# Altium PCB timer.PcbDoc
Units mil, origin at the board's own origin, x right, y up, seen from the top; angles counter-clockwise.
Board outline 3110.24 x 1574.8 mil, 2 copper layers (Top Layer, Bottom Layer); 36 components, 45 nets, 137 pads, 17 vias.
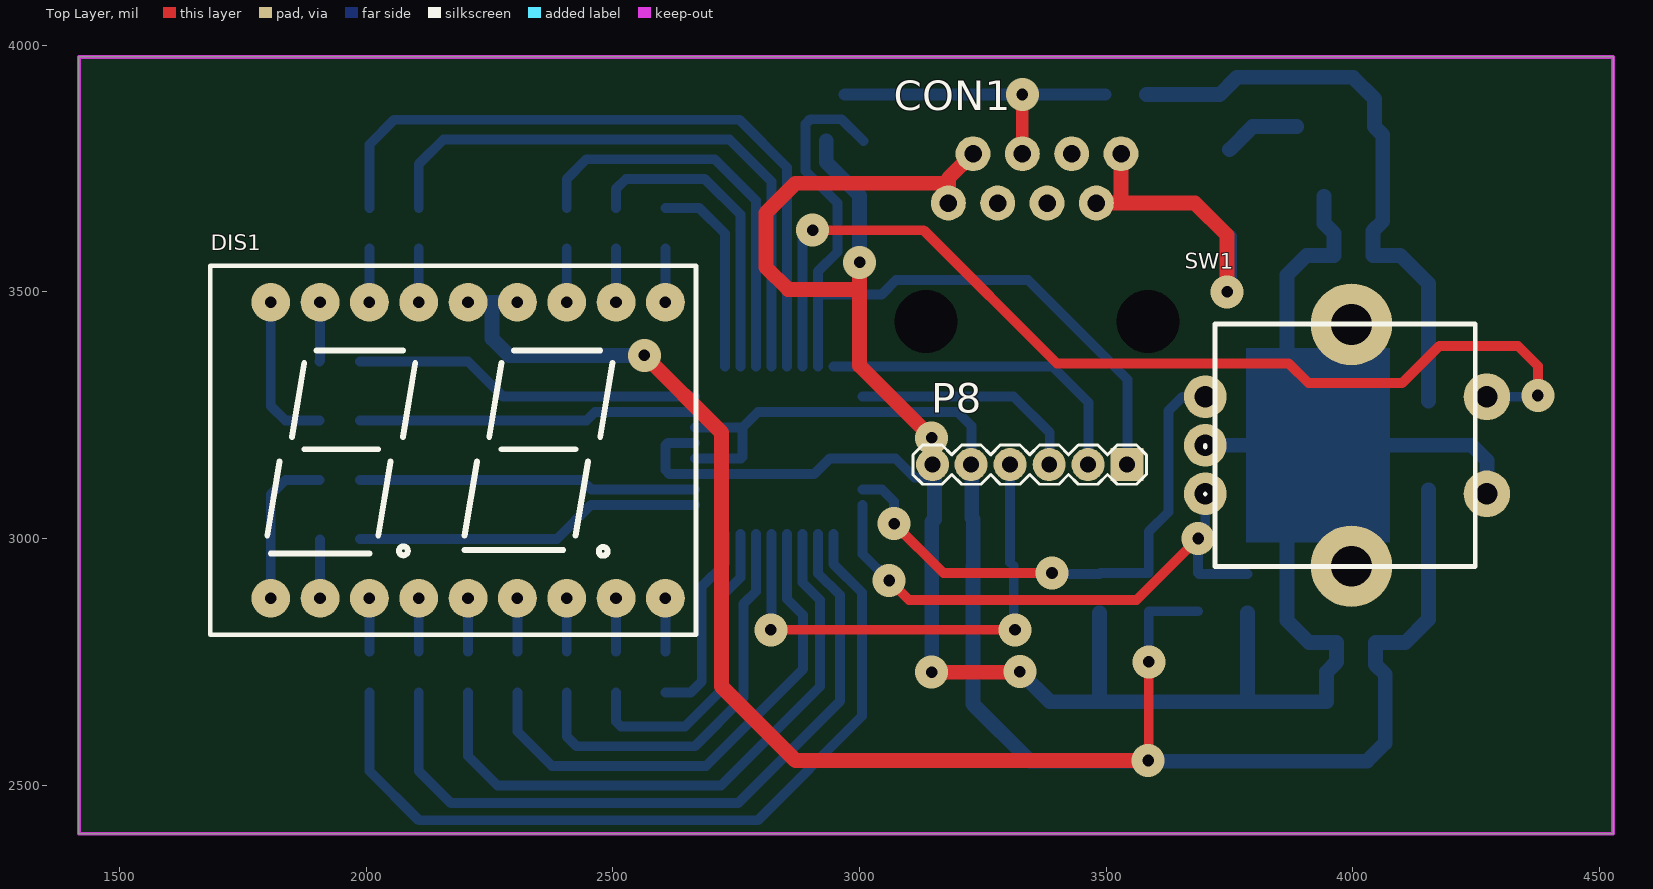
[diagram p0: Top Layer view]
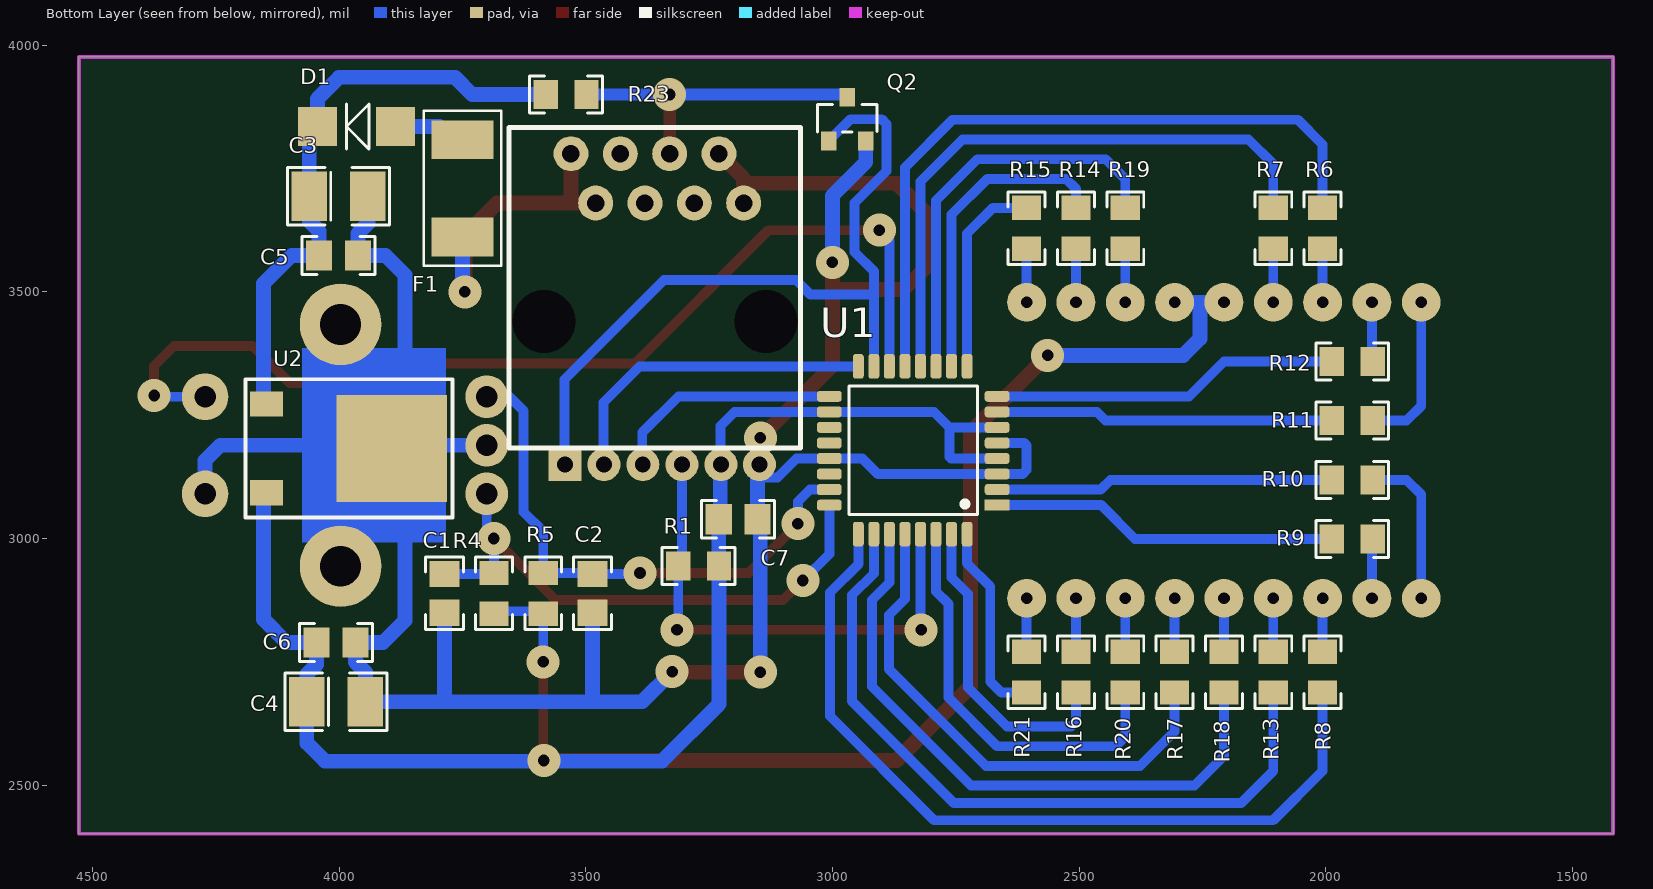
[diagram p1: Bottom Layer view, seen from below]
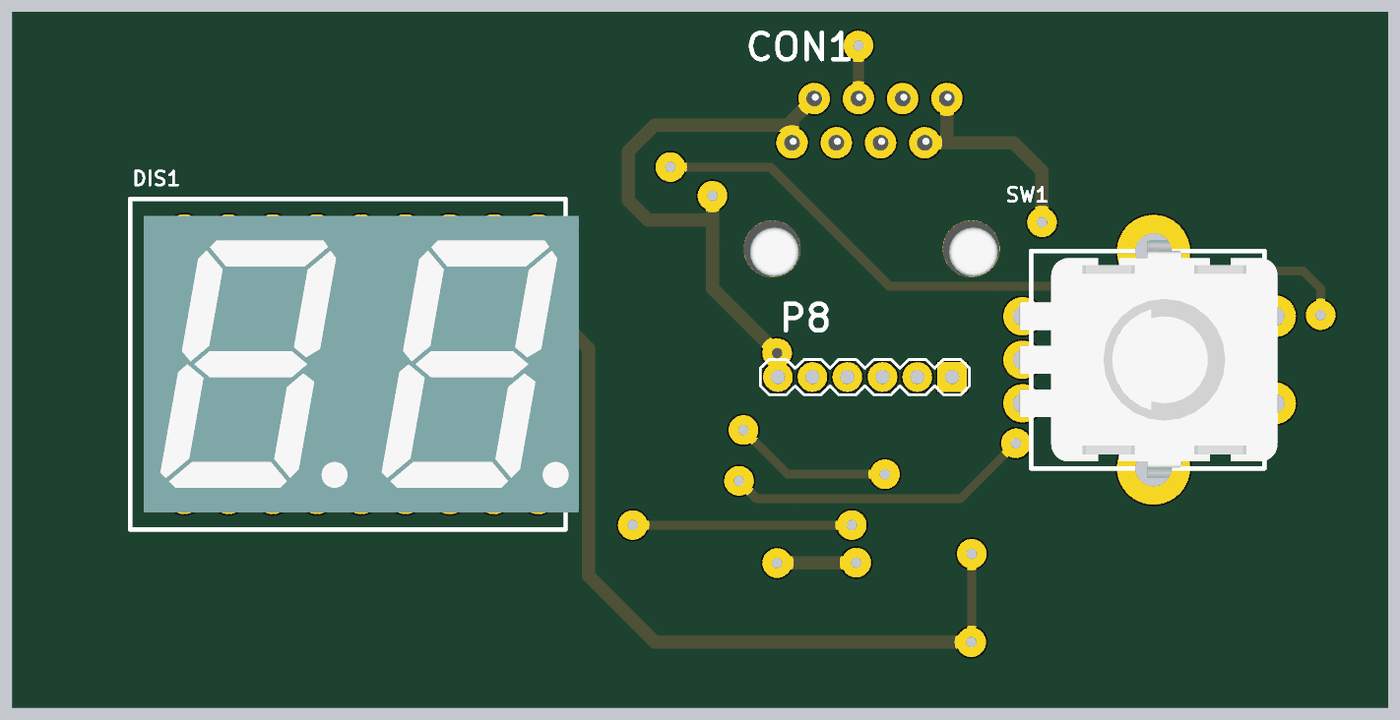
[diagram p2: 3D render of the assembled board from above, using the file's embedded part models]

## Layer stack, top to bottom
Top Layer: signal copper 1.4
Dielectric: dielectric 12.6, FR-4, Dk 4.8
Bottom Layer: signal copper 1.4

## Board outline
1417.32,2401.57 4527.56,2401.57 4527.56,3976.38 1417.32,3976.38

## Design rules (kind name [scope] priority, off if disabled: settings)
Clearance [All] p1: gap=5
ComponentClearance [All] p1 off: gap=10 collisioncheckmode=3 verticalgap=10 showdistances=FALSE
Height [All] p1 off: minheight=0 maxheight=1968.5 prefheight=500
PolygonConnect [All] p1: connectstyle=Relief reliefconductorwidth=10 reliefentries=4 polygonreliefangle="90 Angle" airgapwidth=10
RoutingVias [All] p1: holewidth=19.68 width=39.37 viastyle="Through Hole" minholewidth=19.68 minwidth=39.37 maxholewidth=19.68 maxwidth=39.37
SolderMaskExpansion [All] p1: expansion=4
Width [All] p1: maxlimit=50 minlimit=10 preferedwidth=20
26 further rules are at their usual default settings.

## Components (designator, comment, footprint, x,y, rotation, side; value= is the part's Value field where it differs from the comment)
C1 "100nF" C0805 3786.22,2888.98 r270 bottom
C2 "100nF" C0805 3486.22,2888.98 r270 bottom
C3 "4,7uF" TANC_B 4001.22,3693.98 r180 bottom
C4 "10uF" TANC_B 4006.22,2668.98 r180 bottom
C5 "100nF" C0805 4001.22,3573.98 r180 bottom
C6 "100nF" C0805 4006.22,2788.98 r180 bottom
C7 "100nF" C0805 3191.22,3038.98 r180 bottom
CON1 "MTJ-88FX1" MTJ-88FX1 3285,3570 r0 top
D1 "M4" SMA 3965,3835 r180 bottom
DIS1 "OPD-D5630LR-BW" OPD-D5631LR-BW 2156.22,3178.98 r0 top
F1 "0679-0500-01" 0679-0500-01 3750,3710 r90 bottom
P8 "Header 6 2mm" MA06-1_2mm 3345,3150 r180 top
Q2 "2N7002" SOT23 2970,3850 r180 bottom
R1 "10K" R0805 3271.22,2943.98 r0 bottom
R4 "10K" R0805 3686.22,2888.98 r270 bottom
R5 "10K" R0805 3586.22,2888.98 r270 bottom
R6 "180R" R0805 2006.22,3628.98 r90 bottom
R7 "180R" R0805 2106.22,3628.98 r90 bottom
R8 "180R" R0805 2006.22,2728.98 r270 bottom
R9 "180R" R0805 1946.22,2998.98 r0 bottom
R10 "180R" R0805 1946.22,3118.98 r0 bottom
R11 "180R" R0805 1946.22,3238.98 r0 bottom
R12 "180R" R0805 1946.22,3358.98 r0 bottom
R13 "180R" R0805 2106.22,2728.98 r270 bottom
R14 "180R" R0805 2506.22,3628.98 r90 bottom
R15 "180R" R0805 2606.22,3628.98 r90 bottom
R16 "180R" R0805 2506.22,2728.98 r270 bottom
R17 "180R" R0805 2306.22,2728.98 r270 bottom
R18 "180R" R0805 2206.22,2728.98 r270 bottom
R19 "180R" R0805 2406.22,3628.98 r90 bottom
R20 "180R" R0805 2406.22,2728.98 r270 bottom
R21 "180R" R0805 2606.22,2728.98 r270 bottom
R23 "10K" R0805 3540,3900 r0 bottom
SW1 "ENCODER" EC12E20-24P24C-SW 3986.22,3188.98 r270 top
U1 "ATmega8-AU/MU" TQFP-32A 2836.22,3178.98 r0 bottom
U2 "MC7805CDTG" TO-252 4020,3182.8 r270 bottom

## Footprints (in the part's own frame and the unit in brackets; to place one, negate y for a bottom-side part, rotate by r counter-clockwise, add the part's x,y. Pads: shape width x height; smd on the part's side, far side on the other; paste and mask are expansions set on the pad)
0679-0500-01 [mm]
  rect 2x3.18 smd: 1(-2.5,0) 2(2.5,0)
  silkscreen extent -4,-2 4,2, body extent -3.05,-1.3 3.05,1.39, height 2.69
C0805 [mm] "Chip Capacitor, Body 2.0x1.2mm, Height 1.3mm, IPC Low Density"
  rect 1.35x1.55 smd: 1(-1,0) 2(1,0)
  silkscreen extent -1.88,-0.97 1.88,0.97, body extent -1.1,-0.72 1.1,0.72, height 1.3
EC12E20-24P24C-SW [mm]
  round 2.2 hole 1.1: A(-2.5,-7.25) B(2.5,-7.25) C(0,-7.25)
  round 4.2 hole 2.1: M(-6.225,0.275) M(6.225,0.275)
  round 2.4 hole 1.1: S1(-2.5,7.25) S2(2.5,7.25)
  silkscreen extent -6.25,-7.25 6.25,6.65, body extent -6.85,-7.43 6.81,7.4, height 21
MA06-1_2mm [mm]
  rect 1.7x1.7 hole 0.813: 1(-5,0)
  round 1.7 hole 0.813: 2(-3,0) 3(-1,0) 4(1.016,0) 5(3.023,0) 6(5.004,0)
  silkscreen extent -6,-1 6.02,1.02
MTJ-88FX1 [mm]
  round 1.8 hole 0.9: 1(6.223,5.334) 2(4.953,2.794) 3(3.683,5.334) 4(2.413,2.794) 5(1.143,5.334) 6(-0.127,2.794) 7(-1.397,5.334) 8(-2.667,2.794)
  round 0 hole 3.25: M(-3.81,-3.302) M(7.62,-3.302)
  Top Layer lines w0.25: -3.81,-3.302 -3.595,-3.302
  body extent -5.61,-9.83 9.67,6.73, height 16.55
OPD-D5631LR-BW [mm]
  round 2 hole 0.6: 1(-8.89,-7.62) 2(-6.35,-7.62) 3(-3.81,-7.62) 4(-1.27,-7.62) 5(1.27,-7.62) 6(3.81,-7.62) 7(6.35,-7.62) 8(8.89,-7.62) 9(11.43,-7.62) 10(11.43,7.62) 11(8.89,7.62) 12(6.35,7.62) 13(3.81,7.62) 14(1.27,7.62) 15(-1.27,7.62) 16(-3.81,7.62) 17(-6.35,7.62) 18(-8.89,7.62)
  Top Layer lines w0.25: -9.525,-7.95 -9.474,-7.95
  silkscreen extent -12,-9.5 13,9.5, body extent -11.23,-8.51 13.77,8.51, height 8
R0805 [mm] "Chip Resistor, Body 2.0x1.3mm, IPC Low Density"
  rect 1.25x1.5 smd: 1(-1.05,0) 2(1.05,0)
  silkscreen extent -1.88,-0.95 1.88,0.95, body extent -1.1,-0.67 1.1,0.67, height 0.7
SMA [mil]
  rect 79x79 smd: 1(-78.87,0) 2(78.87,0)
  silkscreen extent -20,-46 26,46, body extent -98,-53 98,53, height 87
SOT23 [mil]
  rect 32x38 smd: 1(-37.6,-44.33) 2(37.6,-44.33) 3(0,44.33)
  silkscreen extent -60,-26 60,30, body extent -57,-49 57,48, height 40
TANC_B [mil]
  rect 72x100 smd: 1(-59.53,0) 2(59.53,0)
  silkscreen extent -103,-58 103,58, body extent -69,-55 70,55, height 75
TO-252 [mm]
  rect 1.3x1.7 smd: 1(-2.285,-3.22) 3(2.285,-3.22)
  rect 5.5x5.7 smd: 2(0,3.22)
  silkscreen extent -3.56,-4.32 3.56,6.35, body extent -3.29,-3.95 3.29,5.75, height 2.3
TQFP-32A [mil]
  rect 50x22 smd: 1(-170,111.22)
  rrect50% 50x22 smd: 2(-170,79.72) 3(-170,48.23) 4(-170,16.73) 5(-170,-14.76) 6(-170,-46.26) 7(-170,-77.76) 8(-170,-109.25) 17(170,-109.25) 18(170,-77.76) 19(170,-46.26) 20(170,-14.76) 21(170,16.73) 22(170,48.23) 23(170,79.72) 24(170,111.22)
  rrect50% 22x50 smd: 9(-109.25,-170) 10(-77.76,-170) 11(-46.26,-170) 12(-14.76,-170) 13(16.73,-170) 14(48.23,-170) 15(79.72,-170) 16(111.22,-170) 25(111.22,170) 26(79.72,170) 27(48.23,170) 28(16.73,170) 29(-14.76,170) 30(-46.26,170) 31(-77.76,170) 32(-109.25,170)
  silkscreen extent -130,-130 130,130, body extent -180,-180 182,182, height 47

## Part data
C1 C2 C5 C6 C7: library part Cap, "Capacitor"
C3 C4: library part Cap_Pol, "Capacitor Polarized"
D1: library part Diode
DIS1: library part 2x8SEGMENTS
F1: "Bezpiecznik: topikowy; szybki; ceramiczny; 500mA; 125VAC; 125VDC"
P8: library part "Header 6", "Header, 6-Pin"
Q2: library part 2N7002(GSD), "N-MOSFET"
R1 R4 R5 R6 R7 R8 R9 R10 R11 R12 R13 R14 R15 R16 R17 R18 R19 R20 R21 R23: library part Res, "Resistor"
SW1: "EC12E20-24P24C-SW"
U1: "TQFP - 32pin / MLF - 32pin"
U2: library part 78xx

## Via types
v1: diameter 66.93, hole 23.62, Top Layer to Bottom Layer, 17 vias

## Nets (pads, with @x,y where several pads share a name; then routed paths per layer and width w, separated by ;. In a path a pad name is that pad's centre, name@x,y a point inside that pad or via, vN(x,y) a via of type N, cw(c..) or ccw(c..) an arc to the next point about the centre after c; other vN are vias at no path point)
5V: C4.1 C6.1 C7.1 DIS1.13 DIS1.14 P8.5 R1.1 R4.2 R5.2 U1.4 U1.6 U1.18 U2.3 | length 5362
  Top Layer w20: v1@3586.22,2548.78 v1(3586.22,2750)
  Top Layer w30: DIS1.13 DIS1.13@2316.02,3478.98 ; v1(2563.78,3371.22) 2720,3215 2720,2700 2870,2550 v1(3585,2550)
  Bottom Layer w20: U1.4 2759.49,3162.24 2762.48,3165.24 2762.48,3225.24 ; U1.6 2762.48,3225.24 ; P8.5@3227.22,3148.98 3227.22,3227.78 3198.27,3256.73 U1.18 2793.98,3256.73 2762.48,3225.24 ; R1.1 R1.1@3230.59,2944.69 ; v1@3586.22,2761.22 R5.2 ; R5.2@3586.22,2852.64 R4.2@3686.22,2852.64
  Bottom Layer w30: DIS1.14 2255,3478.98 ; DIS1.13 2255,3478.98 ; v1(2563.78,3371.22) 2288.78,3371.22 2255,3405 2255,3478.98 ; C7.1@3227.22,3042.35 P8.5@3227.22,3148.98 ; R1.1 3229.88,2664.37 3345.75,2548.5 4028.5,2548.5 4065.75,2585.75 C4.1 4065.75,2724.45 4045.59,2744.61 C6.1 4106.22,2788.98 4152.99,2835.75 U2.3@4152.99,3099.02 ; R1.1@3230.59,2944.69 C7.1
12V: C3.1 C5.1 D1.1 R23.2 U2.1 | length 1201.9
  Bottom Layer w30: R23.2 3730,3900 3765,3935 4000,3935 4043.87,3891.13 D1.1 4060.75,3818.12 C3.1 4060.75,3643.5 4040.59,3623.35 C5.1 4096.22,3573.98 4152.99,3517.2 U2.1@4152.99,3278.94
A1: R6.2 U1.13 | length 1439.4
  Bottom Layer w20: R6.2 2006.22,3798.98 2056.22,3848.98 2756.22,3848.98 2852.95,3752.24 U1.13
A2: R14.2 U1.10 | length 636.9
  Bottom Layer w20: R14.2 2506.22,3708.98 2526.22,3728.98 2686.22,3728.98 2758.46,3656.73 U1.10
B1: R7.2 U1.12 | length 1234.7
  Bottom Layer w20: R7.2 2106.22,3758.98 2156.22,3808.98 2736.22,3808.98 2821.46,3723.74 U1.12
B2: R15.2 U1.9 | length 411.6
  Bottom Layer w20: R15.2 2674.88,3670.32 2726.97,3618.23 U1.9
C1: R8.2 U1.25 | length 1679.1
  Bottom Layer w20: R8.2 2006.22,2528.98 2106.22,2428.98 2793.98,2428.98 3005,2640 3005,2890.2 2947.44,2947.76 U1.25
C2: R16.2 U1.31 | length 639.3
  Bottom Layer w20: R16.2 2506.22,2628.98 2516.22,2618.98 2646.22,2618.98 2725,2697.76 2725,2887.76 2758.46,2921.22 U1.31
D1: R9.2 U1.1 | length 707.2
  Bottom Layer w20: R9.2 2386.22,2998.98 2455,3067.76 U1.1
D2: R17.2 U1.28 | length 1054.9
  Bottom Layer w20: R17.2 2306.22,2608.98 2376.22,2538.98 2688.98,2538.98 2885,2735 2885,2845.2 2852.95,2877.24 U1.28
DP1: R13.2 U1.26 | length 1481.9
  Bottom Layer w20: R13.2 2106.22,2528.98 2171.22,2463.98 2753.98,2463.98 2960,2670 2960,2885.2 2915.94,2929.25 U1.26
DP2: R21.2 U1.32 | length 401.5
  Bottom Layer w20: R21.2 2657.64,2687.64 2680,2710 2680,2902.76 2726.97,2949.72 U1.32
E1: R10.2 U1.2 | length 686.8
  Bottom Layer w20: R10.2 2436.22,3118.98 2455.94,3099.25 U1.2
E2: R18.2 U1.27 | length 1274.3
  Bottom Layer w20: R18.2 2206.22,2558.98 2266.22,2498.98 2718.98,2498.98 2920,2700 2920,2875.2 2884.45,2910.75 U1.27
EN_A: C2.1 R5.1 SW1.A U1.23 | length 1104.5
  Top Layer w20: v1(3070,3030) 3170,2930 v1(3390,2930)
  Bottom Layer w20: U1.23 3045.75,3099.25 3070,3075 v1(3070,3030) ; v1(3390,2930) 3391.65,2928.35 C2.1 3488.19,2930.32 R5.1 ; R5.1@3586.22,2935.32 3586.22,3013.98 3626.22,3053.98 3626.22,3258.98 3654.65,3287.4 SW1.A
EN_B: C1.1 R4.1 SW1.B U1.24 | length 1136.7
  Top Layer w20: v1(3060,2915) 3100,2875 3561.22,2875 v1(3686.22,3000)
  Bottom Layer w20: U1.24 3006.22,2968.78 v1(3060,2915) ; SW1.B 3700.79,3023.54 3686.22,3008.98 v1(3686.22,3000) R4.1 3688.19,2928.35 C1.1
EN_SW: SW1.S1 U1.14 | length 2095
  Top Layer w20: v1(2905,3625) 3130,3625 3400,3355 3870,3355 3910,3315 4100,3315 4175,3390 4335,3390 4375,3350 v1(4375,3290)
  Bottom Layer w20: U1.14 2884.45,3604.45 v1(2905,3625) ; SW1.S1 4372.4,3287.4 v1(4375,3290)
F1: R11.2 U1.7 | length 686
  Bottom Layer w20: R11.2 2446.22,3238.98 2463.98,3256.73 U1.7
F2: R19.2 U1.11 | length 829.9
  Bottom Layer w20: R19.2 2406.22,3728.98 2446.22,3768.98 2706.22,3768.98 2789.96,3685.24 U1.11
G1: R12.2 U1.8 | length 708
  Bottom Layer w20: R12.2 2206.02,3358.98 2276.77,3288.23 U1.8
G2: R20.2 U1.30 | length 838.2
  Bottom Layer w20: R20.2 2406.22,2598.98 2426.22,2578.98 2666.22,2578.98 2765,2677.76 2765,2867.76 2789.96,2892.72 U1.30
GND: C1.2 C2.2 C3.2 C4.2 C5.2 C6.2 C7.2 CON1.7 CON1.8 P8.6 Q2.2 SW1.C SW1.M SW1.S2 U1.3 U1.5 U1.21 U2.2 | length 5605
  Top Layer w30: v1(3000,3560) 3000,3505 ; v1(3146.22,2728.98) 3323.98,2728.98 v1(3325,2730) ; v1(3146.22,3203.98) 3000,3350.2 3000,3505 ; CON1.8 CON1.8@3180,3715 ; CON1.7 3180,3730 CON1.8@3180,3715 ; 3000,3505 2855,3505 2810,3550 2810,3660 2870,3720 3175,3720 CON1.8@3180,3715
  Bottom Layer w20: U1.5 2610.98,3193.74 2606.22,3188.98 2606.22,3138.78 2614.25,3130.75 U1.3 2907.99,3130.75 2939.49,3162.24 U1.21 3072.95,3162.24 3111.22,3123.98 P8.6@3149.22,3123.98
  Bottom Layer w30: Q2.2 2932.4,3762.6 3000,3695 v1(3000,3560) ; v1(3146.22,2728.98) 3146.22,3033.35 C7.2 P8.6@3151.85,3123.98 ; v1(3325,2730) 3386.02,2668.98 3486.22,2668.98 ; C2.2 3486.22,2668.98 ; SW1.C U2.2@3866.22,3188.98 ; C1.2 3786.22,2668.98 ; U2.2@3899.45,3188.98 4241.02,3188.98 4271.65,3158.35 SW1.S2 ; C3.2 3941.69,3638.5 3961.85,3618.35 C5.2 3906.22,3573.98 3866.22,3533.98 U2.2@3866.22,3188.98 ; 3486.22,2668.98 3786.22,2668.98 ; 3786.22,2668.98 C4.2 3946.69,2729.45 3966.85,2749.61 C6.2 3911.22,2788.98 3866.22,2833.98 U2.2@3866.22,3188.98
MISO: P8.2 U1.16 | length 674.1
  Bottom Layer w20: U1.16 3391.22,3348.98 3464.33,3275.87 P8.2@3464.33,3148.98
MOSI: P8.1 Q2.1 U1.15 | length 1571.8
  Bottom Layer w20: U1.15 2915.94,3490.94 ; Q2.1 2963.27,3850 2900,3850 2890,3840 2890,3745 2955,3680 2955,3580.76 2915.94,3541.7 2915.94,3490.94 ; P8.1@3543.07,3148.98 3543.07,3322.13 3341.22,3523.98 3073.98,3523.98 3045,3495 2920,3495 2915.94,3490.94
NetCON1_1: CON1.1 CON1.2 F1.1 | length 618.5
  Top Layer w30: CON1.2 3680,3680 3745,3615 v1(3745,3500) ; 3530,3680 CON1.1
  Bottom Layer w30: v1@3750,3500 F1.1
NetD1_2: D1.2 F1.2 | length 155.4
  Bottom Layer w30: F1.2@3750,3788.43 3796.57,3835 D1.2
NetDIS1_1: DIS1.1 R10.1 | length 321.1
  Bottom Layer w20: DIS1.1 1806.22,3088.98 1836.22,3118.98 R10.1
NetDIS1_2: DIS1.2 R9.1 | length 118.7
  Bottom Layer w20: DIS1.2 R9.1@1906.22,2997.64
NetDIS1_3: DIS1.3 R8.1 | length 108.7
  Bottom Layer w20: R8.1 DIS1.3
NetDIS1_4: DIS1.4 R13.1 | length 108.7
  Bottom Layer w20: R13.1 DIS1.4
NetDIS1_5: DIS1.5 R18.1 | length 108.7
  Bottom Layer w20: R18.1 DIS1.5
NetDIS1_6: DIS1.6 R17.1 | length 108.7
  Bottom Layer w20: R17.1 DIS1.6
NetDIS1_7: DIS1.7 R20.1 | length 108.7
  Bottom Layer w20: R20.1 DIS1.7
NetDIS1_8: DIS1.8 R16.1 | length 108.7
  Bottom Layer w20: R16.1 DIS1.8
NetDIS1_9: DIS1.9 R21.1 | length 108.7
  Bottom Layer w20: R21.1 DIS1.9
NetDIS1_10: DIS1.10 R15.1 | length 108.7
  Bottom Layer w20: DIS1.10 R15.1
NetDIS1_11: DIS1.11 R14.1 | length 108.7
  Bottom Layer w20: DIS1.11 R14.1
NetDIS1_12: DIS1.12 R19.1 | length 108.7
  Bottom Layer w20: DIS1.12 R19.1
NetDIS1_15: DIS1.15 R7.1 | length 108.7
  Bottom Layer w20: DIS1.15 R7.1
NetDIS1_16: DIS1.16 R6.1 | length 108.7
  Bottom Layer w20: DIS1.16 R6.1
NetDIS1_17: DIS1.17 R12.1 | length 120.6
  Bottom Layer w20: R12.1 1906.22,3360.32 DIS1.17
NetDIS1_18: DIS1.18 R11.1 | length 321.1
  Bottom Layer w20: DIS1.18 1806.22,3268.98 1836.22,3238.98 R11.1
OUT_H: CON1.5 Q2.3 R23.1 | length 648.7
  Top Layer w25: CON1.5 v1(3330,3900)
  Bottom Layer w25: Q2.3@2970,3900 v1(3330,3900) R23.1
RST: P8.4 R1.2 U1.29 | length 986.7
  Top Layer w20: v1@2821.46,2833.74 2840.2,2815 3287.24,2815 v1@3306.22,2833.98
  Bottom Layer w20: v1@2821.46,2833.74 U1.29 ; R1.2@3305,2951.54 P8.4 ; v1@3306.22,2833.98 3312.56,2840.32 R1.2
  other v1: 2820,2815 3315,2815
SCK: P8.3 U1.17 | length 475.5
  Bottom Layer w20: U1.17 3311.97,3288.23 3385.59,3214.61 P8.3@3385.59,3148.98
pads on no net: CON1.3 CON1.4 CON1.6 CON1.M U1.19 U1.20 U1.22

## Keep-outs
Keep-Out Layer:
  lines w7.87: 1417.32,2401.57 3858.27,2401.57 4527.56,2401.57 4527.56,3976.38 1417.32,3976.38 1417.32,2401.57

## Other copper
Bottom Layer:
  rectangle net GND: 3783.5,2992.13 4074.8,3385.83

## Silkscreen, mask and mechanical layers (free items; w line width, h text height)
Top Overlay:
  lines w9.84: 1686.22,2804.96 1683.78,2804.96 2668.03,2804.96